# EAGLE board 555_timer_v1.1 (EAGLE 5.10)
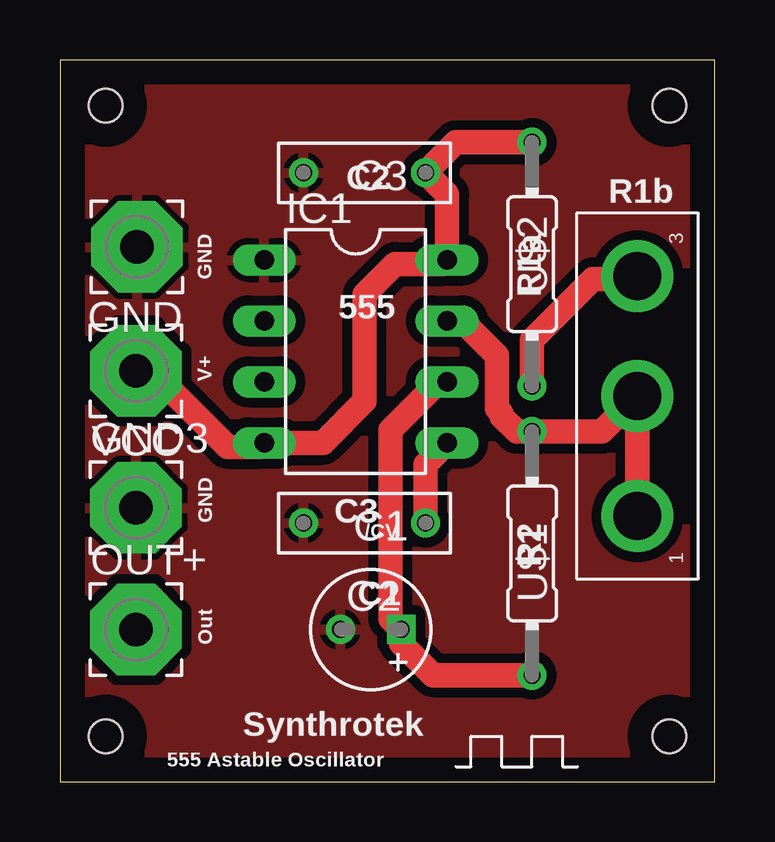
[diagram p0: board, top side]
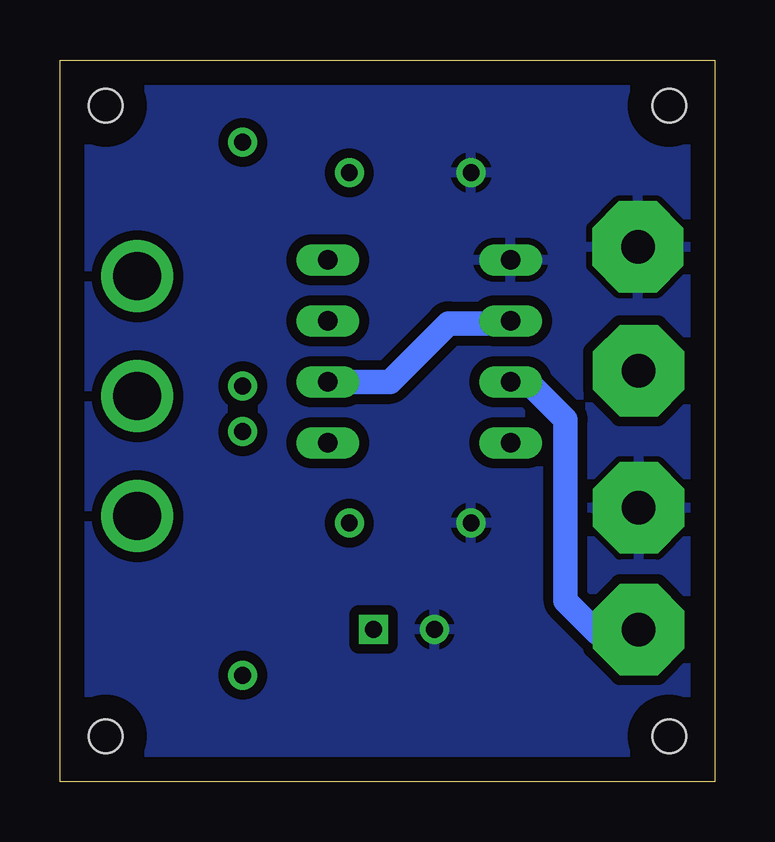
[diagram p1: board, bottom side, seen from below]

Size 27.3 x 30.1 mm. Coordinates in mm from the lower left corner, seen from the top.
Outline: 0,0 27.3,0 27.3,30.1 0,30.1 0,0
Copper layers (1*16): Top 0.035mm / dielectric 1.5mm / Bottom 0.035mm
Design rules "default": minimum track width 10mil, minimum drill 24mil, track to track 8mil, track to pad 8mil, pad to pad 8mil, via to via 8mil, smd to smd 8mil, copper to edge 40mil, drill to drill 8mil, minimum pad ring 10mil, minimum via ring 8mil, stop-mask expansion 4mil, vias tented up to drill 0mil, thermal gap 10mil
Holes 1.4 mm at 1.91,28.19 25.4,28.19 25.4,1.91 1.91,1.91

## Footprints (pad centres in the part's own frame; a part is rotated, then mirrored left to right if it is on the bottom)
072X025 = drill 0.7 round: 1 -2.54,0; 2 2.54,0
050_020_1 = drill 0.7 square: + -1.27,0 | drill 0.7 round: - 1.27,0
3,81/1,4 = drill 1.397 pad 3.81 octagon: 1 0,0
DIL08 = drill 0.813 long: 1 -3.81,-3.81; 2 -1.27,-3.81; 3 1.27,-3.81; 4 3.81,-3.81; 5 3.81,3.81; 6 1.27,3.81; 7 -1.27,3.81; 8 -3.81,3.81
POT = drill 2 round: 1 -5,0; 2 0,0; 3 5,0
R0207/4 = drill 0.7 round: 1 -5.08,0; 2 5.08,0

## Placement (x,y rotation side)
C1  [072X025]  12.7,10.79 180 top
C2  [050_020_1]  12.96,6.36 180 top
C3  [072X025]  12.7,25.4 180 top
GND  [3,81/1,4]  3.21,22.31 180 top
GND3  [3,81/1,4]  3.17,11.43 0 top
IC1  ICM7555  [DIL08]  12.33,17.95 270 top
OUT+  [3,81/1,4]  3.17,6.35 0 top
POT1  [POT]  24.08,16.09 90 top
U$1  3MM.3  [R0207/4]  19.68,9.53 270 top
U$2  3MM.3  [R0207/4]  19.68,21.59 90 top
VCC  [3,81/1,4]  3.17,17.14 180 top

## Library data of the parts
C1 C3 = gm-caps-film-box
C2 = gm-caps-electro-pol
GND GND3 OUT+ VCC = wirepad
IC1 = maxim
POT1 = 00_steve
U$1 U$2 = gm-resistors

## Nets
+9V: C3.1 IC1.4 IC1.8 U$2.2 VCC.1
GND: C1.2 C2.- C3.2 GND3.1 GND.1 IC1.1
N$1: IC1.3 OUT+.1
N$2: IC1.7 POT1.1 POT1.2 U$1.1
N$3: C1.1 IC1.5
N$4: C2.+ IC1.2 IC1.6 U$1.2
N$5: POT1.3 U$2.1

## Tracks (layer width: path | path; a pad name or v marks a point on that pad's centre or on a via)
+9V
  Top 1.016: VCC.1 3.81,17.14 6.99,13.97 8.35,13.97 IC1.4 10.96,14.14 12.7,15.88 12.7,20.32 13.97,21.59 15.97,21.59 IC1.8 16.14,24.5 C3.1 16.51,26.67 U$2.2
GND
  pour Bottom (isolate 0.406): 0,29.78 27.11,29.78 27.11,26.67 27.11,0.44 0.44,0.44 0.44,1.33 0.44,29.34 0,29.34
  pour Top (isolate 0.406): 0,30.23 27.11,30.23 27.11,0.44 0,0.44
N$1
  Bottom 1.016: IC1.3 7.79,16.68 6.22,15.11 6.22,7.56 4.89,6.22 3.3,6.22 OUT+.1
N$2
  Top 1.016: 23.55,15.56 22.6,14.61 U$1.1 19.05,14.61 18.41,15.24 18.41,15.37 18.22,15.56 18.22,17.78 16.89,19.11 16.24,19.11 IC1.7 | 23.55,15.56 POT1.2 | POT1.1 24.08,15.04 23.55,15.56
N$3
  Top 1.016: C1.1 15.24,13.24 IC1.5
N$4
  Top 1.016: IC1.6 15.79,16.68 13.78,14.67 13.78,6.8 C2.+ 14.23,5.77 15.56,4.45 U$1.2
  Bottom 1.016: IC1.6 13.55,16.68 11.11,19.11 8.62,19.11 IC1.2
N$5
  Top 1.016: U$2.1 19.68,18.41 22.23,20.95 23.95,20.95 POT1.3

## Text on the board
tPlace: C2 | R1b | GND | R1a | 555 | V+ | GND | C3 | R2 | /CV | C1 | Out | Synthrotek | 555 Astable Oscillator